# Altium PCB SENSEI_Base-Board_Clean.PcbDoc (part 2 of 7)
Units mm, origin at the board's own origin, x right, y up, seen from the top; angles counter-clockwise.
Board outline 25.2 x 15.15 mm, 8 copper layers (Top Sig/Pwr, GND1, Sig1, GND2, Sig2, Pwr, GND3, Bot Sig/Pwr), stack 1.53 mm thick; 187 components, 192 nets, 951 pads, 1831 vias.
Unrouted connection lines stored in the file: 214.
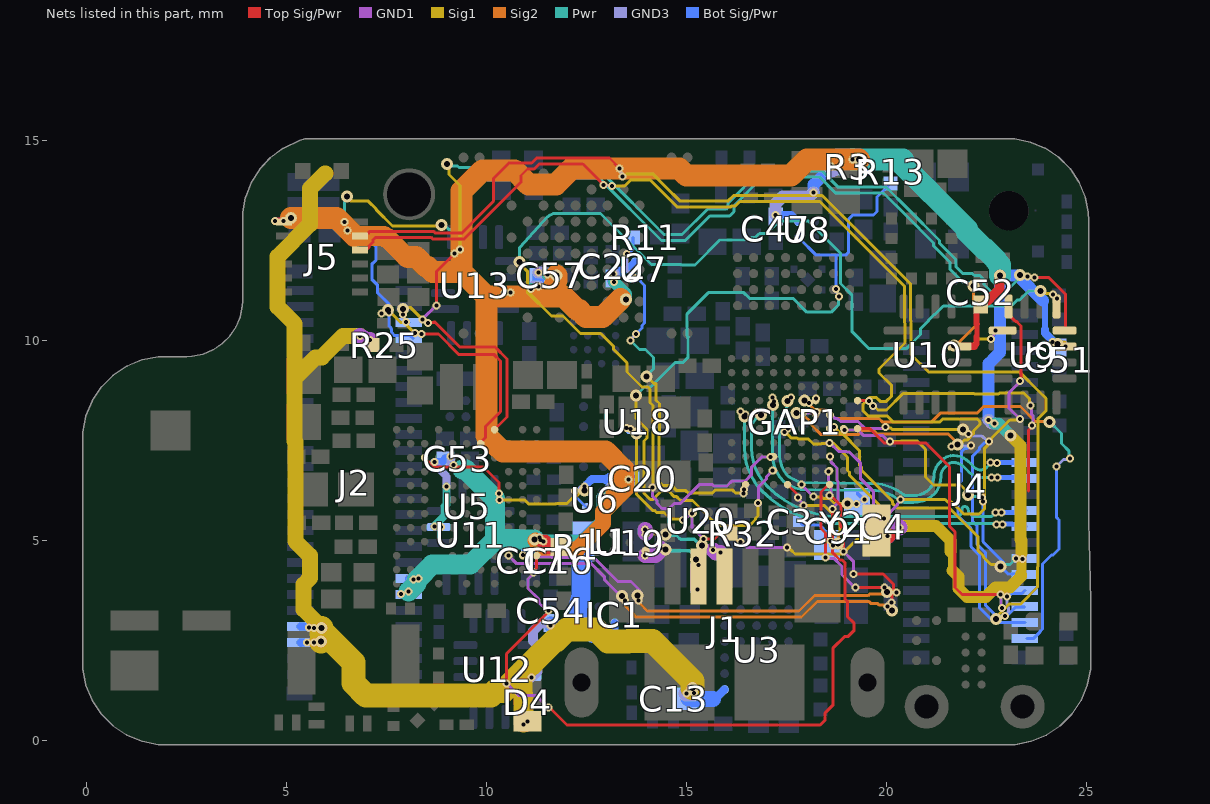
[diagram p8: the nets of this part, all layers, seen from the top]

## Part data
C3 C4: "No Description Available", Capacitance=20pF, Mfr_Name=Kemet, Copyright="Copyright (C) 2022 Ultra Librarian. All rights reserved.", Manufacturer_Part_Number=CBR02C200F5GAC, RefDes=RefDes, Type=DEV
C5 C6 C7 C12 C18 C20 C22 C23 C47 C51 C52 C53 C54 C57 C64 C65 C69 C70 C74 C84 C92 C95 C97: library part CMP-13271-003594-1, "Cap Ceramic 1uF 10V X5R ±10% Pad SMD 0201 +85°C T/R", Capacitance=1uF, Case Code (Imperial)=0201, Case Code (Metric)=0603, Max Operating Temperature=85°C, Min Operating Temperature=-55°C, Tolerance=10%, Voltage Rating=10V, Case/Package=0201, Length=0.024inch, Mount="Surface Mount", Packaging="Cut Tape", Thickness=0.013inch, Width=0.012inch
C8 C10 C13 C14 C24 C49 C55: library part CMP-2000-05437-2, "CAP CER 4.7UF 6.3V X5R 0402", Capacitance=4.7uF, Case/Package=0402, Dielectric=X5R, Dielectric Material=Ceramic, Max Operating Temperature=85°C, Min Operating Temperature=-55°C, Tolerance=10%, Voltage=6.3V, Depth=0.5mm, Height=0.5mm, Lead Free="Lead Free", Length=1mm, Mount="Surface Mount", RoHS Compliant=Yes, Series=C, Termination=SMD/SMT
C9 C11 C19 C21 C25 C26 C27 C28 C29 C30 C31 C33 C34 C35 C36 C37 C38 C39 C48 C50 C56 C58 C60 C61 C73 C75 C76 C77 C78 C79 C80 C81 C82 C85 C86 C88 C89 C90 C94 C96 C98 C99: library part CMP-06035-035508-1, "Chip Multilayer Ceramic Capacitors for General Purpose, 0201, 0.10uF, X7R, 15%, 10%, 16V", Capacitance=0.1uF, Case/Package=0201
C15 C16 C17 C40 C41 C42 C43: library part CMP-13271-000286-1, "Cap Ceramic 22uF 6.3V X5R ±20% SMD 0402 +85°C Paper T/R", Capacitance=22uF, Case Code (Imperial)=0402, Case Code (Metric)=1005, Max Operating Temperature=85°C, Min Operating Temperature=-55°C, Tolerance=20%, Voltage Rating=6.3V, Case/Package=0402, Length=0.039inch, Mount="Surface Mount", Packaging="Tape and Reel", Thickness=0.022inch, Width=0.02inch
C32 C44 C59 C83 C87: library part CMP-13271-000002-1, "CAP CER 10UF 10V X5R 0402", Capacitance=10uF, Manufacturer=Samsung, Temperature="-55°C to +85°C", Temperature Characteristic=X5R, Temperature Coefficient=15%, Temperature Range High=+85°C, Temperature Range Low=-55°C, Tolerance=20%, Voltage Rating=10V, Automotive=No, Category=Cap, ComponentLink2Description=Datasheet, ComponentLink2URL=http://www.samsungsem.com/kr/support/product-search/mlcc/__icsFiles/afieldfile/2019/05/10/19-CL05A106MP5NUNC.pdf, Device Class L1="Passive Components", Device Class L2=Capacitors, Device Class L3="Ceramic Capacitors", Digikey Description="CAP CER 10UF 10V X5R 0402", Height=0.7mm, Ipc Land Pattern Name=CAPC10050X50, Lead Free=Yes, Manufacturer Part Number=CL05A106MP5NUNC, Material=Ceramic, Octopart=https://octopart.com/cl05a106mp5nunc-samsung-22457395, Package=CL05A106MP5NUNC, RoHS=TRUE
C45 C93: library part CMP-06035-014902-1, "Chip Multilayer Ceramic Capacitors for General Purpose, 0402, 2.2uF, X7S, 22%, 10%, 6.3V", Capacitance=2.2uF, Case Code (Imperial)=0402, Case Code (Metric)=1005, Dielectric=X7S, Max Operating Temperature=125°C, Min Operating Temperature=-55°C, Package Quantity=10000, Resistor Type=Ceramic, Tolerance=10%, Voltage Rating=6.3V, Case/Package=0402, Height=0.5mm, Length=0.039inch, Mount="Surface Mount", Packaging="Tape and Reel", Termination=SMD/SMT, Thickness=0.022inch, Voltage Rating (DC)=6.3V, Weight=0.000212oz, Width=0.02inch
C46: library part CMP-06035-035563-1, "Chip Multilayer Ceramic Capacitors for General Purpose, 0201, 3300pF, X7R, 15%, 10%, 25V", Capacitance=3.3nF, Case Code (Imperial)=0201, Case Code (Metric)=0603, Dielectric=X7R, Max Operating Temperature=125°C, Min Operating Temperature=-55°C, Package Quantity=15000, Resistor Type=Ceramic, Tolerance=10%, Voltage Rating=25V, Case/Package=0201, Height=0.3mm, Length=0.024inch, Mount="Surface Mount", Packaging="Tape and Reel", Termination=SMD/SMT, Thickness=0.013inch, Voltage Rating (DC)=25V, Weight=1.2E-05oz, Width=0.012inch
C62 C63: library part CMP-06035-019132-1, "Chip Multilayer Ceramic Capacitors for General Purpose, 0201, 110pF, C0G, 30ppm/°C, 5%, 50V", Capacitance=110pF, Case Code (Imperial)=0201, Case Code (Metric)=0603, Dielectric=C0G, Max Operating Temperature=125°C, Min Operating Temperature=-55°C, Package Quantity=1, Tolerance=5%, Voltage Rating=50V, Case/Package=0201, Height=0.3mm, Length=0.024inch, Mount="Surface Mount", Packaging="Tape and Reel", Termination=SMD/SMT, Thickness=0.013inch, Voltage Rating (DC)=50V, Weight=1.2E-05oz, Width=0.3mm
C66: library part CMP-2010-01694-2, "Chip Multilayer Ceramic Capacitors for General Purpose, 0201, 2200pF, X7R, 15%, 10%, 16V", Capacitance=2.2nF, Case Code (Imperial)=0201, Case Code (Metric)=0603, Dielectric=X7R, Max Operating Temperature=125°C, Min Operating Temperature=-55°C, Package Quantity=1, Tolerance=10%, Voltage=16V, Case/Package=0201, Depth=0.3mm, Height=0.3mm, Lead Free="Lead Free", Length=0.6mm, Material=Ceramic, Mount="Surface Mount", Packaging="Tape and Reel", Radiation Hardening=No, REACH SVHC="No SVHC", Termination=SMD/SMT, Thickness=0.013inch, Voltage Rating=16V, Voltage Rating (DC)=16V, Width=0.012inch
C67: library part CMP-2010-00919-2, "Ceramic Capacitor 0.7pF ±0.1pF 25V C0G 0201 (0603 Metric)", Capacitance=0.7pF, Case Code (Imperial)=0201, Case Code (Metric)=0603, Dielectric=C0G, Max Operating Temperature=125°C, Min Operating Temperature=-55°C, Package Quantity=15000, Voltage Rating=25V, Case/Package=0201, Depth=0.3mm, Height=0.3mm, Lead Free="Lead Free", Length=0.6mm, Mount="Surface Mount", Packaging="Tape and Reel", Radiation Hardening=No, Termination=SMD/SMT, Thickness=0.013inch, Voltage Rating (DC)=25V, Width=0.012inch
C68: library part CMP-06035-035508-1, Case/Package=0201, Capacitance=DNF
C71 C72: library part CMP-2000-05437-2, "CAP CER 4.7UF 6.3V X5R 0402 10%", Capacitance=4.7uF, Case/Package=0402, Dielectric=X5R, Dielectric Material=Ceramic, Max Operating Temperature=85°C, Min Operating Temperature=-55°C, Tolerance=10%, Voltage=6.3V, Depth=0.5mm, Height=0.5mm, Lead Free="Lead Free", Length=1mm, Mount="Surface Mount", RoHS Compliant=Yes, Series=C, Termination=SMD/SMT
C91: library part CMP-06035-033356-1, "Chip Multilayer Ceramic Capacitors for General Purpose, 0805, 100uF, X5R, 15%, 20%, 4V", Capacitance=100uF, Case Code (Imperial)=0805, Case Code (Metric)=2012, Dielectric=X5R, Max Operating Temperature=85°C, Min Operating Temperature=-55°C, Tolerance=20%, Voltage Rating=4V, Case/Package=0805, Length=0.079inch, Mount="Surface Mount", Packaging="Tape and Reel", Thickness=0.057inch, Voltage Rating (DC)=4V, Width=0.049inch
D1: library part D_RGB_LED, "SML-LX0404SIUPGUSB RGB LED", Manufacturer=Lumex, Supplier Part Number 1=696-LX0404SIUPGUSB, Manufacturer Part Number=SML-LX0404SIUPGUSB, Supplier 1=Mouser
D2 D3: "TVS Diode (Bi-directional)", Manufacturer_Name="Texas Instruments", Mouser Part Number=595-TPD1E01B04DPYRQ1, Arrow Part Number=TPD1E01B04DPYRQ1, Arrow Price/Stock=https://www.arrow.com/en/products/tpd1e01b04dpyrq1/texas-instruments?region=nac, Datasheet Link=https://www.ti.com/lit/ds/symlink/tpd1e01b04-q1.pdf?ts=1677834076075&ref_url=https%253A%252F%252Fwww.ti.com%252Fproduct%252FTPD1E01B04-Q1%252Fpart-details%252FTPD1E01B04DPYRQ1, Height=0.45mm, Manufacturer_Part_Number=TPD1E01B04DPYRQ1, Mouser Price/Stock=https://www.mouser.co.uk/ProductDetail/Texas-Instruments/TPD1E01B04DPYRQ1?qs=doiCPypUmgEwTnvBpZhkOw%3D%3D
D4: library part CMP-1055-00233-1, "Schottky Barrier Diode, 2-Pin DSN, Pb-Free, Tape and Reel", Manufacturer="On Semiconductor", ComponentLink1Description="Manufacturer URL", ComponentLink1URL=http://www.onsemi.com/, ComponentLink2Description=Datasheet, ComponentLink2URL=http://www.onsemi.com/pub_link/Collateral/NSR20F30-D.PDF, ComponentLink3Description="Package Specification", ComponentLink3URL=http://www.onsemi.cn/pub_link/Collateral/152AB.PDF, Configuration=Single, DatasheetVersion="Rev. 3", IFSM Max (A)=28, Mounting Technology="Surface Mount", PackageDescription="2-Pin Micro Molded Package, Body 1.6 x 0.8 mm", PackageReference=DSN-2-512AB-01, PackageVersion="Rev. B, 01/2011", Packing="Tape and Reel", PartNumber=NSR20F30NXT5G, RoHS=TRUE
E1: "Integrated Chip Antenna", Manufacturer="Fractus Antennas", Supplier Part Number 1=128-NN03-320, Manufacturer Part Number=NN03-320, Supplier 1=Mouser
E2: library part U.FL-R-SMT-1(01)_GND_pad
IC1: library part MAX38643AENT+, "Integrated Circuit", Manufacturer_Name="Analog Devices", Mouser Part Number=700-MAX38643AENT+, Datasheet Link=https://www.mouser.com/datasheet/2/256/MAX38640A-MAX38643B-1516623.pdf, Height=0.5mm, Manufacturer_Part_Number=MAX38643AENT+, Mouser Price/Stock=https://www.mouser.co.uk/ProductDetail/Maxim-Integrated/MAX38643AENT%2b?qs=PzGy0jfpSMssjCGgbzOt4w%3D%3D
IC2: "Integrated Circuit", Manufacturer_Name="Texas Instruments", Mouser Part Number=595-TS5A3153YZPR, Datasheet Link=http://www.ti.com/lit/gpn/ts5a3153, Height=0.5mm, Manufacturer_Part_Number=TS5A3153YZPR, Mouser Price/Stock=https://www.mouser.co.uk/ProductDetail/Texas-Instruments/TS5A3153YZPR?qs=BBezV1N05%2FtCq%2FSrTOTYog%3D%3D
IC3: "Integrated Circuit", Manufacturer_Name="Texas Instruments", Mouser Part Number=595-TS5A3167YZPR, Arrow Part Number=TS5A3167YZPR, Arrow Price/Stock=https://www.arrow.com/en/products/ts5a3167yzpr/texas-instruments, Datasheet Link=http://www.ti.com/lit/gpn/ts5a3167, Height=0.5mm, Manufacturer_Part_Number=TS5A3167YZPR, Mouser Price/Stock=https://www.mouser.co.uk/ProductDetail/Texas-Instruments/TS5A3167YZPR/?qs=0O%2FZFlpUpJV2gM0iE3NeCQ%3D%3D
J1: "No Description Available", Mfr_Name="Global Connector Technology", Copyright="Copyright (C) 2023 Ultra Librarian. All rights reserved.", Manufacturer_Part_Number=USB3076-30-A, RefDes=RefDes, Type=DEV
J2: library part CONN_50P_M_COMBI_INTERFACE, "50Pin 0.4mm pitch connector footprint that accepts (male) connectors intended for different stacking heights: / Hirose - DF40C-50DP-0.4V(51) for 1.5mm - 3mm stacking height / JAE - WP7B-P050VA1-R8000 - for 0.7mm stacking height"
J4: "CONN PLUG 40POS SMD GOLD", Current Rating=300mA, Max Operating Temperature=85°C, Min Operating Temperature=-35°C, Package Quantity=1, Voltage Rating=30V, Connector Type=Plug, Contact Material=Bronze, Contact Plating=Gold, Gender=Male, Housing Material=Polymer, Lead Free="Lead Free", Mated Stacking Heights=4mm, Mount="Surface Mount", Number of Contacts=40, Number of Positions=40, Number of Rows=2, Orientation=Straight, Packaging="Tape and Reel", Pitch=0.4mm, REACH SVHC="No SVHC", Termination=SMD/SMT
J5: "Connector", Manufacturer_Name=Molex, Mouser Part Number=538-505066-1222, Datasheet Link=https://www.molex.com/pdm_docs/sd/5050661222_sd.pdf, Height=0.63mm, Manufacturer_Part_Number=505066-1222, Mouser Price/Stock=https://www.mouser.co.uk/ProductDetail/Molex/505066-1222?qs=byeeYqUIh0OlQo7UKX%2FsWw%3D%3D
J8: library part DF52-2S-0.8H_21_, "Connector", Manufacturer_Name=Hirose, Mouser Part Number=798-DF52-2S-0.8H21, Datasheet Link=https://datasheet.datasheetarchive.com/originals/distributors/DKDS-30/591726.pdf, Height=1mm, Manufacturer_Part_Number=DF52-2S-0.8H(21), Mouser Price/Stock=https://www.mouser.co.uk/ProductDetail/Hirose-Connector/DF52-2S-0.8H21?qs=%2FKR40Cd6GUpAHUMGMtWbig%3D%3D
L1: library part CMP-06042-016331-1, "FIXED IND 1UH 1.6A 144 MOHM SMD", Case Code (Imperial)=0603, Case Code (Metric)=1608, Current Rating=1.6A, DC Resistance (DCR)=144mR, Inductance=1uH, Max Operating Temperature=85°C, Min Operating Temperature=-40°C, Saturation Current=2A, Test Frequency=1MHz, Tolerance=20%, Case/Package=0603, Core Material=Metal, Mount="Surface Mount", Packaging="Cut Tape", RoHS Compliant=Yes, Shielding=Shielded
L2: library part L_0805_1.5uH_2A, "L 1.5uH 2A 0805", Inductance=1.5uH, Manufacturer=Murata, Manufacturer Part Number=DFE201210S-1R5M=P2, Supplier Part Number 1=81-DFE201210S-1R5MP2, Supplier 1=Mouser
L3 L10: library part CMP-06042-017052-1, "Multilayer type Inductor for Power Lines 10uH ±20% @1MHz, 300mA, Max DCR 1.365Ω, SRF 32MHz", Parameter 1=10uH
L4 L5: library part CMP-06042-003257-1, "Film type RF Inductor 2.2nH ±0.1nH 600mA 0.12Ω 0201 (0603)", Case Code (Imperial)=0201, Case Code (Metric)=0603, Current Rating=600mA, DC Resistance (DCR)=120mR, Inductance=2.2nH, Max Operating Temperature=125°C, Min Operating Temperature=-55°C, Resistor Type="Thin Film", Self Resonant Frequency=9GHz, Test Frequency=500MHz, Case/Package=0201, Core Material=Non-Magnetic, Mount="Surface Mount", Packaging="Tape and Reel", Shielding=Unshielded
L6 L8 L9: library part CMP-06042-008254-1, "Wire Wound RF Inductor 5.6nH ±5% 330mA 0.33Ω 0201 (0603)", Case/Package=Nonstandard, Current Rating=330mA, DC Resistance (DCR)=330mR, Inductance=5.6nH, Max Operating Temperature=125°C, Min Operating Temperature=-55°C, Package Quantity=10000, Resistor Type=Wirewound, Self Resonant Frequency=8.3GHz, Test Frequency=100MHz, Tolerance=5%, Core Material=Non-Magnetic, Height=0.4mm, Height - Seated (Max)=0.018inch, Length=0.021inch, Max DC Current=330mA, Mount="Surface Mount", Packaging="Tape and Reel", Q Factor=47, Shielding=Unshielded, Termination=SMD/SMT, Width=0.016inch
L7: library part CMP-06042-006199-1, "Shielded Wirewound Inductor 4.7uH 20% 1100mA 0.288Ω 0806 (2016)"
MIC1: "No Description Available", Mfr_Name=InvenSense, Copyright="Copyright (C) 2023 Ultra Librarian. All rights reserved.", Manufacturer_Part_Number=MMICT5838-00-012, RefDes=RefDes, Type=DEV
R1 R3 R5 R8 R10: library part CMP-2002-03047-1, Manufacturer="Vishay Dale", Tolerance=1%, Part Number=CRCW04021R00FKEDHP
R4: library part CMP-2004-01604-1, Manufacturer="KOA Speer", Resistance=22k, Part Number=RK73H1HTTC2202F
R6 R7: library part CMP-1010-00642-1, "100K 0.05W 1% 0201 (0603 Metric)  SMD", Case-EIA=0201, Case-Metric=0603, Power="0.05 W", Tolerance="1 %", Technology=SMT
R9 R24 R26 R27 R28 R29 R31: library part CMP-26527-002755-1, "RES 10K OHM 1% 1/20W 0201", Case Code (Imperial)=0201, Case Code (Metric)=0603, Max Operating Temperature=125°C, Max Power Dissipation=50mW, Min Operating Temperature=-55°C, Resistance=10k, Resistor Type="Thick Film", Temperature Coefficient=200ppm/°C, Tolerance=1%, Case/Package=0201, Contact Plating=Tin, Height=0.009inch, Length=0.024inch, Mount="Surface Mount", Number of Terminations=2, Packaging="Tape and Reel", Power Rating=50mW, RoHS Compliant=Yes, Series=RMCF, Width=0.012inch
R11 R12 R13 R17 R32: library part CMP-1010-00146-1, "1M 0.05W 5% 0201 (0603 Metric)  SMD", Case-EIA=0201, Case-Metric=0603, Power="0.05 W", Tolerance="5 %", Technology=SMT
R14 R15: library part CMP-2002-01533-2, "100kΩ ±0.5% 0.0625W 1/16W Chip Resistor 0402 (1005 Metric) Thin Film", Case Code (Imperial)=0402, Case Code (Metric)=1005, Max Operating Temperature=125°C, Max Power Dissipation=63mW, Min Operating Temperature=-55°C, Package Quantity=1, Resistance=100k, Resistance Tolerance=0.5%, Resistor Type="Thin Film", Temperature Coefficient=25ppm/°C, Voltage Rating=25V, Case/Package=0402, Height=0.016inch, Lead Free="Lead Free", Length=0.039inch, Number of Pins=2, Number of Terminations=2, Packaging="Tape and Reel", Power Rating=63mW, REACH SVHC="No SVHC", RoHS Compliant=Yes, Series=RR, Technology="THIN FILM", Termination=SMD/SMT, Tolerance=0.5%, Voltage Rating (DC)=25V, Width=0.02inch, Working Voltage=25V
R16: library part "RES DNM", "Resistor"
R18 R21 R30: library part CMP-26527-001890-1
R19 R20: library part CMP-2004-03369-1, Manufacturer=Panasonic, Resistance=500, Part Number=ERJ-1GNF4990C
R22: library part CMP-1010-00642-1, "100K 0.05W 1% 0201 (0603 Metric)  SMD", Case-EIA=0201, Case-Metric=0603, Power="0.05 W", Resistance=100k, Tolerance="1 %", Technology=SMT
R23: library part CMP-26527-001890-1, "0Ω ±0 0.05W 0201 Thick Film Chip Resistor AEC-Q200 compliant", Case Code (Imperial)=0201, Case Code (Metric)=0603, Max Operating Temperature=125°C, Max Power Dissipation=50mW, Min Operating Temperature=-55°C, Package Quantity=10000, Resistance=0Ohm, Resistor Type="Thick Film", Case/Package=0201, Contact Plating=Tin, Height=0.009inch, Height - Seated (Max)=0.01inch, Lead Free="Lead Free", Length=0.024inch, Mount="Surface Mount", Number of Terminations=2, Packaging="Tape and Reel", Power Rating=50mW, Radiation Hardening=No, RoHS Compliant=Yes, Series=RMCF, Width=0.012inch
R25: library part CMP-1010-00176-1, "2R2 0.05W 1% 0201 (0603 Metric)  SMD", Case-EIA=0201, Case-Metric=0603, Power="0.05 W", Tolerance="1 %", Technology=SMT
R33 R34: library part CMP-26527-007617-1, "RES 0 OHM JUMPER 1/16W 0402", Case Code (Imperial)=0402, Case Code (Metric)=1005, Current Rating=1A, Max Operating Temperature=155°C, Max Power Dissipation=63mW, Min Operating Temperature=-55°C, Resistance=0R, Resistor Type="Thick Film", Working Voltage=50V, Case/Package=0402, Construction=Rectangular, Contact Plating=Tin, Depth=0.5mm, Features="Automotive AEC-Q200", Height=0.016inch, Lead Free="Lead Free", Length=0.039inch, Military Standard=Not, Mount="Surface Mount", Number of Terminations=2, Packaging="Tape and Reel", Power Rating=63mW, Radiation Hardening=No, RoHS Compliant=Yes, Series=RMCF, Technology="THICK FILM", Width=0.02inch
R35 R44 R45 R46 R47 R48: library part CMP-2004-00655-1, Manufacturer="Vishay Dale", Resistance=49.9, Part Number=CRCW020149R9FNED
RT1: "Thermistor", Manufacturer_Name=Panasonic, Mouser Part Number=667-ERT-JZEG103FA, Arrow Part Number=ERT-JZEG103FA, Arrow Price/Stock=https://www.arrow.com/en/products/ert-jzeg103fa/panasonic?region=nac, Datasheet Link=https://industrial.panasonic.com/cdbs/www-data/pdf/AUA0000/AUA0000C8.pdf, Height=0.33mm, Manufacturer_Part_Number=ERT-JZEG103FA, Mouser Price/Stock=https://www.mouser.co.uk/ProductDetail/Panasonic/ERT-JZEG103FA?qs=8rMlxy%252BA7jnazXT5AW8efg%3D%3D
S1: "Switch", Manufacturer_Name=LITTELFUSE, Datasheet Link=https://www.ckswitches.com/media/2866/nanot.pdf, Height=1mm, Manufacturer_Part_Number=NanoT160BP
U1: "Macronix 512 Mbit WLCSP Flash"
U2: "512 Mbit octal SPI PSRAM APmemory", Mfr_Name="AP Memory", Copyright="Copyright (C) 2022 Ultra Librarian. All rights reserved.", Manufacturer_Part_Number=APS512XXN-OB9-WB, RefDes=RefDes, Type=DEV
U3: "Buck-Boost Converter With LDO Regulator 5-OUT 30-Pin WLP T/R", Manufacturer=Maxim, Supplier Part Number 1=700-MAX77654BENV+T, Manufacturer Part Number=MAX77654BENV+T, Supplier 1=Mouser
U4 U6 U7 U8 U18 U20: "Integrated Circuit", Manufacturer_Name="Texas Instruments", Mouser Part Number=595-TPS22916CYFPR, Arrow Part Number=TPS22916CYFPR, Arrow Price/Stock=https://www.arrow.com/en/products/tps22916cyfpr/texas-instruments?region=nac, Datasheet Link=http://www.ti.com/lit/gpn/tps22916, Height=0.5mm, Manufacturer_Part_Number=TPS22916CYFPR, Mouser Price/Stock=https://www.mouser.co.uk/ProductDetail/Texas-Instruments/TPS22916CYFPR?qs=EU6FO9ffTweddKR4NsfVQg%3D%3D
U5: library part nRF5340-CLAA, "Multi-protocol Bluetooth Low Energy, IEEE 802.15.4, ANT and 2.4GHz proprietary system-on-chip", Manufacturer=Nordic, Supplier Part Number 1=949-NRF5340-CLAA-R7, Manufacturer Part Number=NRF5340-CLAA-R7, Supplier 1=Mouser
U9 U10 U11 U12 U13: library part CMP-04892-000017-1, "IC SWITCH", Ambient Temperature Range High=+125°C, Ambient Temperature Range Low=-40°C, Manufacturer="Texas Instruments", Max Junction Temp=+150°C, Max Supply Voltage=5.5V, Min Supply Voltage=1.08V, Nominal Supply Current=0.008uA, On State Resistance=2Ω, Package=RSV0016A, Temperature="-40°C to +125°C", -3Db Bandwith=300MHz, Automotive=No, Category=IC, ComponentLink2Description=Datasheet, ComponentLink2URL=http://www.ti.com/lit/ds/symlink/tmux1111.pdf, Device Class L1="Integrated Circuits (ICs)", Device Class L2="Interface ICs", Device Class L3="Analog Switches", Digikey Description="IC SWITCH", Height=0.55mm, Interface=LVCMOS, Lead Free=Yes, Manufacturer Part Number=TMUX1112RSVR, Mux Demux Ratio=1:1, Number of Circuits=4, Octopart=https://octopart.com/tmux1112rsvr-texas+instruments-99389231, RoHS=TRUE, Standoff Height=0mm, Temperature Range High=+125°C, Temperature Range Low=-40°C, Throw Configuration=SPST
U14: "No Description Available", Mfr_Name=STMicroelectronics, Copyright="Copyright (C) 2023 Ultra Librarian. All rights reserved.", Manufacturer_Part_Number=LIS2DUXS12TR, RefDes=RefDes, Type=DEV
U15: library part IS31FL3194, "LED Driver with Programmable Pattern Sequencing 3-Channel 40mA 8-Pin WCSP T/R", Manufacturer=ISSI, Supplier Part Number 1=2521-IS31FL3194-CLS2-TRCT-ND, Manufacturer Part Number=IS31FL3194-CLS2-TR, Supplier 1=Digi-Key
U17: "QSPI PSRAM in WLCSP package / 144 MHz / 128 Mbit", Mfr_Name="AP Memory", Manufacturer_Part_Number=APS12804O-SQRH-WA
U19: library part PESD1USB30, "ESD Suppressor Diode TVS Uni-Dir 5V 5-Pin WLCSP T/R", Manufacturer="NXP Semiconductors", Supplier Part Number 1=771-PESD1USB30Z, Manufacturer Part Number=PESD1USB30, Supplier 1=Mouser
Y2: "24MHz Â±10ppm Crystal 10pF 150 Ohms 4-SMD, No Lead", Frequency=24MHz, Package="SMD-4 ECS International", Availability=Unavailable, MF="ECS Inc.", MP=ECS-240-10-47Q-CES-TR, Price=None, SnapEDA_Link=https://www.snapeda.com/parts/ECS-240-10-47Q-CES-TR/ECS%20Inc./view-part/4221464/?ref=snap
Y3: library part Y_ECS-320-7-48B-JTM-TR5, "Crystal 32MHz 7pF ±20ppm ±20ppm 4-Pin Ultraminiature CSMD T/R", Manufacturer="ECS International", Supplier Part Number 1=520-ECS320748BJTMTR5, Manufacturer Part Number=ECS-320-7-48B-JTM-TR5, Supplier 1=Mouser
Y4: library part CMP-40224-000031-1, "CRYSTAL 32.7680KHZ 9PF SMD", Case/Package=SMD/SMT, ESR (Equivalent Series Resistance)=90kR, Frequency=32.768kHz, Frequency Tolerance=20ppm, Load Capacitance=9pF, Max Operating Temperature=85°C, Min Operating Temperature=-40°C, Mount="Surface Mount", Packaging="Tape and Reel", RoHS Compliant=Yes

## Free pads (board coordinates)
  round 1.3 hole 1.1: 1(8.064,13.658)

## Via types
v1: diameter 0.2, hole 0.1, Top Sig/Pwr to GND1, 467 vias
v2: diameter 0.2, hole 0.1, GND3 to Bot Sig/Pwr, 431 vias
v3: diameter 0.2, hole 0.1, GND1 to Sig1, 369 vias
v4: diameter 0.3, hole 0.15, Sig1 to Pwr, 279 vias
v5: diameter 0.2, hole 0.1, Pwr to GND3, 270 vias
v6: diameter 0.3, hole 0.15, Top Sig/Pwr to Bot Sig/Pwr, tented both sides, 15 vias

## Nets (pads, with @x,y where several pads share a name; then routed paths per layer and width w, separated by ;. In a path a pad name is that pad's centre, name@x,y a point inside that pad or via, vN(x,y) a via of type N, cw(c..) or ccw(c..) an arc to the next point about the centre after c; other vN are vias at no path point)
1V8: C16.1 C17.1 C20.1 C22.1 C47.1 C51.1 C52.1 C53.1 C54.1 C57.1 C91.1 IC1.B2 J2.6 J2.7 J5.1 L1.2 R1.1 R3.1 U6.A2 U7.A2 U8.A2 U9.11 U10.11 U11.11 U12.11 U13.11 | length 88.7
  Top Sig/Pwr w0.12: 22.25,10.103 22.25,10.113 22.26,10.123 22.26,10.407 22.27,10.416
  Top Sig/Pwr w0.15: 22.211,9.878 22.25,9.917 22.25,10.103 ; 22.243,10.408 22.243,10.601 22.244,10.794 C52.1@22.35,10.9
  Top Sig/Pwr w0.18: v1@4.71,12.986 J5.1@4.818,12.986 ; U10.11@21.825,9.85 21.835,9.86 22.193,9.86 22.211,9.878
  Top Sig/Pwr w0.2: v1(24.25,9.85) U9.11@24.45,9.85
  Top Sig/Pwr w0.25: C52.1@22.35,10.9 22.35,10.946 22.406,11.002 22.535,11.002 22.825,11.293 22.825,11.616 v6(22.835,11.626)
  Top Sig/Pwr w0.4: v1@11.451,4.947 11.54,4.858 11.824,4.858 R1.1@11.849,4.833 ; C91.1@19.75,5.25 19.883,5.117 v1(20.025,5.117)
  GND1 w0.18: v1(4.709,12.986) 4.913,12.986 v3(4.918,12.99)
  GND1 w0.2: v3(11.325,5.075) v1(11.425,4.975) ; v1(24.25,9.85) v3(24.475,9.85)
  GND1 w0.4: v1(20.025,5.117) 20.233,5.325 v3(20.325,5.325)
  Sig2 w0.4: v4@11.219,5 11.439,4.78 12.266,4.78 12.916,5.43 12.916,5.722 13.253,6.059 13.253,6.165
  Sig2 w0.5: 6.701,12.615 7.43,12.615 7.483,12.562 7.518,12.562 7.986,12.095 8.029,12.095
  Sig2 w0.55: v4@5.114,13.066 6.25,13.066 6.701,12.615 ; 8.029,12.095 8.233,12.095 8.493,11.835 8.538,11.835 8.653,11.719 9.378,11.719 ; v4(11.753,11.632) 11.752,11.591 cw(c11.202,11.607) 11.592,11.219 11.471,11.098 ; 13.253,6.165 13.416,6.329 13.416,6.785 12.976,7.225 10.407,7.225 10.316,7.316 10.307,7.316 10,7.623 10,11.098 ; v4@13.346,11.034 12.901,10.59 12.487,10.59 12.318,10.759 12.273,10.759 11.933,11.098 11.592,11.098 11.471,11.098 ; v4(19.313,14.525) 18.011,14.525 17.611,14.125 14.993,14.125 14.822,14.296 12.124,14.296 11.732,13.904 11.048,13.904 10.696,14.256 9.896,14.256 9.378,13.739 9.378,11.719 ; 9.378,11.719 10,11.098 ; 10,11.098 11.471,11.098
  GND3 w0.18: v2(10.445,11.2) 10.446,11.198 10.6,11.198 v5(10.601,11.197)
  GND3 w0.2: v2(7.861,3.669) 7.994,3.669 v5(8.05,3.725) ; v2(8.175,4.025) 8.2,4.05 v5(8.3,4.05) ; v5(8.692,5.349) 8.852,5.349 v2(8.856,5.345) ; v2(8.7,6.963) 8.7,6.907 9.001,6.606 v5(9.001,6.353) ; v2@9.097,7.027 9.097,6.959 v5(9.171,6.885) ; v2(11.175,5.025) 11.18,5.02 v5(11.353,5.02) ; v5(24.15,9.969) 24.269,9.85 24.275,9.85 v2(24.3,9.825)
  GND3 w0.25: v2(11.126,1.581) 11.266,1.722 11.266,2.378 11.157,2.487 11.157,2.621 11.158,2.736 11.352,2.93 11.544,2.93 v2(11.597,2.877)
  GND3 w0.3: v5(11.112,11.284) 11.179,11.35 v2(11.3,11.35) ; v2(11.3,11.7) 11.478,11.7 v5(11.524,11.654) ; v5(12.902,6.101) 13.33,6.529 v2(13.548,6.529) ; v2(13.17,11.668) 13.17,11.48 v5(13.183,11.467) ; v2(17.222,13.136) 17.222,13.42 17.402,13.599 18.068,13.599 v2(18.175,13.707) ; v2(22.55,8.013) 22.636,7.926 v5(22.696,7.926)
  GND3 w0.55: v2(18.611,14.356) 18.778,14.523 v5(19.148,14.523)
  Sig1 w0.15: 21.599,4.732 21.599,4.625 21.612,4.612 21.612,4.288 21.642,4.258
  Sig1 w0.18: v3(4.918,12.99) 4.921,12.994 5.011,12.994 5.082,13.065 v4(5.114,13.065)
  Sig1 w0.2: v4(11.2,5.025) 11.219,5.044 11.294,5.044 v3(11.325,5.075) ; v4(24.267,9.915) 24.286,9.896 24.429,9.896 v3(24.475,9.85)
  Sig1 w0.25: 23.362,4.15 23.375,4.163 23.375,4.675
  Sig1 w0.3: v3(20.325,5.325) 20.369,5.369 21.231,5.369 21.6,5 21.6,4.733 21.599,4.732 ; 21.642,4.258 21.795,4.105 21.795,3.807 22.007,3.594 22.486,3.594 22.717,3.826 23.083,3.826 23.362,4.105 23.362,4.15 ; v4@23.1,7.625 v4(23.103,7.623) 23.35,7.375 23.35,5.024 23.374,5 23.374,4.676 23.375,4.675
  Pwr w0.2: v5(8.692,5.349) 8.692,5.366 8.953,5.628 8.953,5.848 9.001,5.896 v5(9.001,6.353) ; v5(9.171,6.885) 9.284,6.772 9.396,6.772 ; v4(11.2,5.025) 11.205,5.02 v5(11.353,5.02) ; v5(24.15,9.969) 24.185,9.969 24.239,9.915 v4(24.267,9.915)
  Pwr w0.3: v5(10.601,11.197) 10.973,11.197 11.06,11.284 v5(11.112,11.284) ; v5(11.353,5.02) 11.374,4.999 12.384,4.999 12.902,5.517 v5(12.902,6.101) ; v5(11.524,11.654) v4(11.753,11.632) ; v5(13.183,11.467) 13.485,11.166 v4(13.485,11.028) ; v5(22.696,7.926) 22.802,7.926 23.103,7.625 v4(23.103,7.623)
  Pwr w0.5: v5(8.05,3.725) 8.253,3.928 v5@8.253,4.014 ; v5(8.3,4.05) 8.3,4.061 8.639,4.4 9.596,4.4 10.205,5.009 ; 9.396,6.772 9.481,6.772 10.205,6.048 10.205,5.009 ; v4(11.2,5.025) 10.81,5.025 10.79,5.045 10.241,5.045 10.205,5.009
  Pwr w0.55: v5(19.148,14.523) 19.311,14.523 v4(19.313,14.525) 19.803,14.525 20.404,14.525 ; 20.273,14.525 22.013,12.786 22.013,12.715 22.439,12.288 22.466,12.288 22.73,12.025 22.73,11.997 22.835,11.893 v6(22.835,11.626)
  Bot Sig/Pwr w0.15: 23.955,10.986 23.96,10.981 23.96,10.273
  Bot Sig/Pwr w0.18: v2(10.445,11.2) 10.495,11.2 U13.11@10.51,11.184 ; IC1.B2@13.198,2.945 13.207,2.936 13.207,2.758 13.213,2.752 13.213,2.61 ; C22.1@13.289,11.707 13.349,11.767 13.4,11.767 13.402,11.769 13.501,11.762 13.707,11.968 U7.A2@13.719,11.968 ; C47.1@17.193,13.189 17.238,13.145 17.617,13.145 17.788,12.975 U8.A2@17.8,12.975
  Bot Sig/Pwr w0.2: v2(7.861,3.669) 7.861,3.66 7.871,3.65 J2.6@8.055,3.65 ; J2.7@8.055,4.05 8.15,4.05 v2(8.175,4.025) ; v2(8.7,6.963) 8.702,6.965 8.891,6.965 C53.1@8.972,7.046 C53.1@8.966,7.053 ; C17.1@11.1,4.875 11.1,4.95 v2(11.175,5.025) ; U6.A2@12.5,6.225 12.501,6.226 12.501,6.408 12.631,6.538 12.987,6.538 13,6.525 ; 23.912,11.035 23.955,10.991 23.955,10.986 ; 23.96,10.273 23.96,10.192 C51.1@24.275,9.877 ; C51.1@24.275,9.891 C51.1@24.275,9.877 ; C51.1@24.291,9.861 C51.1@24.275,9.877
  Bot Sig/Pwr w0.25: 13,6.525 13.075,6.525 13.1,6.55
  Bot Sig/Pwr w0.3: v2(11.3,11.35) C57.1@11.3,11.635 ; C57.1@11.3,11.635 v2(11.3,11.7) ; 13.1,6.55 C20.1@13.568,6.55 ; C22.1@13.119,11.59 C22.1@13.15,11.621 ; C22.1@13.15,11.55 C22.1@13.15,11.621 ; v2(13.17,11.668) 13.15,11.647 C22.1@13.15,11.621 ; C22.1@13.289,11.707 13.261,11.707 13.181,11.627 13.156,11.627 C22.1@13.15,11.621 ; v2(13.548,6.529) C20.1@13.568,6.55 ; C20.1@13.596,6.55 C20.1@13.568,6.55 ; v2(18.175,13.707) 18.175,13.9 18.611,14.336 v2(18.611,14.356) ; v2(22.55,8.013) 22.55,9.421 22.735,9.606 22.835,9.706 v6(22.835,11.626) 23.277,11.626 23.905,10.998
  Bot Sig/Pwr w0.33: v2(11.597,2.877) 11.604,2.884 C54.1@11.604,2.938 ; C54.1@11.615,2.881 11.62,2.876 11.92,2.847 12.014,2.838 12.287,2.838 12.309,2.816 12.404,2.816 12.442,2.816 12.656,2.602 13.205,2.602 13.213,2.61
  Bot Sig/Pwr w0.4: C17.1@11.061,4.849 C17.1@11.219,4.849 ; C17.1@11.219,5 C17.1@11.219,4.849 ; L1.2@12.425,4.975 12.425,4.924 12.39,4.889 12.35,4.849 C17.1@11.219,4.849
  Bot Sig/Pwr w0.48: 12.287,2.838 12.287,3.368 12.357,3.585 12.357,4.422 12.39,4.455 L1.2@12.39,4.889
  other v2: 9.094,7.098
ADS_A_DR: J2.22 U5.G11 U9.1 | length 33.7
  Top Sig/Pwr w0.075: v1(8.378,10.162) 8.795,10.162 9.31,9.646 10.192,9.646 10.346,9.492 10.346,8.223 9.978,7.855 9.978,7.582 9.85,7.454 U5.G11@9.85,7.425
  GND1 w0.075: v3(8.203,10.184) 8.215,10.173 8.367,10.173 v1(8.378,10.162) ; v3(22.614,10.042) 22.614,10.075 22.699,10.16 22.699,10.226 v1(22.723,10.25)
  Sig2 w0.075: v4(21.679,9.876) 21.679,9.879 21.73,9.879 22.278,10.428 22.278,10.837 22.172,10.943 22.172,11.365 v4(22.168,11.365)
  GND3 w0.075: v5(6.442,12.962) 6.466,12.938 6.466,12.849 6.525,12.79 v2(6.525,12.756) ; v5(7.375,10.674) 7.389,10.688 7.54,10.688 v2(7.554,10.702)
  Sig1 w0.075: v4(6.51,13.602) 6.51,13.591 6.614,13.486 7.042,13.486 7.239,13.289 7.239,13.272 7.649,12.862 8.85,12.862 v4(8.878,12.891) ; v4(7.538,10.766) 7.846,10.458 7.929,10.458 v3(8.203,10.184) ; v4(21.679,9.876) 21.679,9.879 22.135,9.879 22.297,10.042 v3(22.614,10.042)
  Pwr w0.075: v5(6.442,12.962) 6.442,13.474 6.51,13.542 v4(6.51,13.602) ; v5(7.375,10.674) 7.409,10.674 7.501,10.766 v4(7.538,10.766) ; v4(8.878,12.891) 8.939,12.891 9.052,12.778 9.122,12.778 9.275,12.931 9.275,13.375 9.919,14.019 10.631,14.019 10.978,13.672 11.77,13.672 12.156,14.059 12.815,14.059 14.373,12.501 14.968,12.501 15.58,13.113 16.077,13.113 16.185,13.221 16.185,13.373 16.9,14.088 17.196,14.088 17.662,14.087 18.326,14.088 18.728,13.686 19.901,13.686 19.91,13.677 19.937,13.677 20.47,13.144 21.175,12.439 21.175,12.368 21.589,11.954 21.589,11.778 21.911,11.456 22.129,11.456 22.172,11.413 22.172,11.369 v4(22.168,11.365)
  Bot Sig/Pwr w0.075: v2(6.525,12.756) 6.53,12.756 6.765,12.521 7.059,12.521 7.232,12.347 7.232,12.01 7.132,11.909 7.132,11.534 7.268,11.398 7.268,11.205 7.554,10.919 v2(7.554,10.702) 7.554,10.378 7.612,10.32 7.612,10.293 7.626,10.279 7.626,10.194 7.697,10.122 8.094,10.122 J2.22@8.166,10.051
ADS_A_DR_GAP: GAP1.E5 U9.16 | length 12.8
  Top Sig/Pwr w0.075: U9.16@23.039,10.898 23.039,10.661 23.219,10.481 23.249,10.481 23.363,10.367 23.363,9.055 23.33,9.023 v1(23.33,8.989)
  GND1 w0.075: v3(17.451,7.718) v1(17.534,7.799) ; v3(19.935,5.557) 19.938,5.557 20.274,5.893 20.274,5.921 20.351,5.998 v3(20.351,6.027) ; v1(23.33,8.989) 23.33,8.962 23.062,8.694 23.062,8.307 v3(23.332,8.037)
  Sig1 w0.075: v3(17.451,7.718) 17.594,7.58 ccw(c17.646,7.634) 17.646,7.559 17.765,7.559 17.784,7.541 18.043,7.541 18.171,7.412 18.363,7.412 18.376,7.425 18.68,7.425 19.023,7.082 19.023,6.754 19.076,6.702 19.076,6.629 19.842,5.862 19.842,5.684 19.935,5.591 v3(19.935,5.557) ; v3(20.351,6.027) 21.464,6.027 21.527,5.965 21.627,5.965 21.929,5.662 22.315,5.662 22.453,5.8 22.453,7.309 22.622,7.478 22.622,7.558 23.08,8.016 23.311,8.016 v3(23.332,8.037)
ADS_B_DR: J2.23 U5.H12 U9.12 | length 30
  Top Sig/Pwr w0.075: v1(8.538,10.434) 8.562,10.458 8.687,10.458 8.699,10.47 9.333,9.836 10.214,9.836 10.512,9.538 10.512,8.087 U5.H12@10.2,7.775 ; v1(8.741,10.877) 8.741,11.712 v1(9.203,12.174) ; v1(23.691,11.572) 24.057,11.572 24.466,11.163 U9.12@24.466,10.238
  GND1 w0.075: v1(8.538,10.434) 8.536,10.434 8.462,10.508 8.415,10.508 v3(8.391,10.532) 8.394,10.532 8.739,10.877 v1(8.741,10.877) ; v1(9.203,12.174) 9.303,12.274 v3(9.335,12.274) ; v3(23.519,11.597) 23.531,11.585 23.679,11.585 v1(23.691,11.572)
  GND3 w0.075: v5(7.908,10.647) 7.931,10.623 7.931,10.562 7.99,10.504 v2(7.99,10.47)
  Sig1 w0.075: v4(7.912,10.795) 7.949,10.832 8.092,10.832 v3(8.391,10.532) ; v4(9.015,14.41) 9.058,14.367 9.058,14.151 9.335,13.875 v3(9.335,12.274) ; v4(23.335,11.645) 23.359,11.621 23.495,11.621 v3(23.519,11.597)
  Pwr w0.075: v5(7.908,10.647) 7.908,10.791 v4(7.912,10.795) ; v4(9.015,14.41) 9.058,14.367 9.274,14.367 9.315,14.325 10.537,14.325 11.04,13.822 11.707,13.822 12.094,14.209 12.877,14.209 14.435,12.651 14.885,12.651 15.519,13.285 15.988,13.285 16.035,13.331 16.035,13.435 16.838,14.238 17.258,14.238 17.6,14.237 18.388,14.238 18.79,13.836 19.963,13.836 19.972,13.827 19.999,13.827 20.532,13.294 21.325,12.501 21.325,12.43 21.739,12.017 21.739,11.84 21.898,11.681 22.137,11.681 22.192,11.626 22.33,11.626 22.435,11.521 22.435,11.404 22.673,11.166 22.923,11.166 23.258,11.501 23.258,11.506 23.335,11.584 v4(23.335,11.645)
  Bot Sig/Pwr w0.075: v2(7.99,10.47) 8.009,10.45 J2.23@8.055,10.45
ADS_B_DR_GAP: GAP1.D3 U9.13 | length 29.8
  GND1 w0.075: v3(14.151,6.322) 14.151,6.099 14.263,5.987 14.263,5.924 14.362,5.826 ccw(c14.415,5.879) 14.409,5.804 14.461,5.801 ccw(c14.476,6.012) 14.626,5.862 14.666,5.902 cw(c14.719,5.849) 14.719,5.924 14.841,5.924 15.313,6.397 15.647,6.397 15.681,6.363 16.01,6.363 16.142,6.494 16.47,6.494 16.619,6.643 16.619,6.829 16.883,7.093 v1(17.096,7.093) ; v3(24.159,11.15) v1(24.254,11.057)
  Sig1 w0.075: v4(10.82,11.964) 10.82,11.932 11.016,11.736 11.016,11.22 11.621,10.616 11.907,10.616 12.347,10.175 12.853,10.175 13.175,9.853 13.175,9.779 13.51,9.444 13.51,9.212 13.883,8.839 14.038,8.839 14.082,8.795 14.082,8.455 14.159,8.377 14.159,6.33 v3(14.151,6.322) ; v4(23.852,11.24) 23.913,11.24 23.979,11.174 24.135,11.174 v3(24.159,11.15)
  Pwr w0.075: v4(10.82,11.964) 10.82,12.288 10.82,12.317 10.84,12.339 11.505,13.076 cw(c11.7,12.9) 11.59,13.138 11.664,13.173 cw(c11.695,13.104) 11.695,13.179 12.846,13.179 14.124,11.901 14.857,11.901 14.866,11.892 15.207,11.892 15.829,12.513 16.448,12.513 16.483,12.549 16.581,12.549 16.605,12.573 16.711,12.573 16.817,12.679 17.005,12.679 17.316,12.991 18.044,12.991 18.848,12.186 18.848,11.428 19.129,11.148 19.129,10.23 19.56,9.799 20.312,9.799 20.315,9.797 20.491,9.797 20.848,10.154 20.848,10.296 21.042,10.49 21.042,10.504 21.195,10.657 21.208,10.657 21.417,10.866 23.1,10.866 23.141,10.907 23.161,10.907 23.266,11.012 23.327,11.012 23.555,11.24 v4(23.852,11.24)
CS_nRF_GAP: GAP1.H1 U5.K3 | length 14.8
  Top Sig/Pwr w0.075: U5.K3@10.9,4.625 v1(10.912,4.635) v1(10.912,4.635) ; v1@18.464,4.586 18.474,4.595 18.474,5.188 18.362,5.299 18.362,6.216 18.546,6.4 GAP1.H1@18.575,6.4 ; v1(19.225,3.825) 19.228,3.828 19.945,3.828 v1(19.948,3.83)
  GND1 w0.075: v1(10.912,4.635) 10.936,4.612 11.025,4.612 11.048,4.588 11.619,4.588 11.625,4.582 12.672,4.582 13.277,3.977 13.609,3.977 13.808,3.778 13.808,3.508 v3(13.8,3.5) ; v1(18.474,4.579) 18.497,4.555 18.682,4.555 18.884,4.353 18.884,4.148 19.206,3.825 v1(19.225,3.825) ; v1(19.948,3.83) 19.982,3.83 20.088,3.724 20.226,3.724 v3(20.25,3.7)
  Sig2 w0.075: v4(13.778,3.63) 13.821,3.587 13.821,3.438 14.022,3.236 15.233,3.236 15.239,3.242 17.266,3.242 17.271,3.237 17.812,3.237 18.198,3.623 19.538,3.623 19.583,3.668 19.962,3.668 v4(20.005,3.711)
  Sig1 w0.075: v4(13.778,3.63) 13.778,3.522 v3(13.8,3.5) ; v4(20.005,3.711) 20.01,3.705 20.245,3.705 v3(20.25,3.7)
CSI_CLK_N: GAP1.E7 J4.17 | length 9.1
  Top Sig/Pwr w0.125: GAP1.E7@17.525,8.5 17.531,8.494 v1(17.531,8.48)
  GND1 w0.125: v1(17.531,8.48) 17.531,8.489 17.611,8.57 v3(17.611,8.579)
  GND3 w0.125: v5(22.6,6.95) 22.762,6.95 v2(22.762,6.941)
  Sig1 w0.075: v4(17.525,8.488) 17.525,8.493 v3(17.611,8.579)
  Pwr w0.075: v4(17.525,8.488) cw(c16.95,8.488) 17.357,8.082 17.332,8.057 ccw(c17.386,8.005) 17.326,8.05 17.326,7.137 ccw(c18.087,7.137) 17.491,6.664 ccw(c18.087,7.137) 17.507,6.645 17.547,6.604 17.688,6.524 ccw(c17.992,7.06) 17.889,6.453 19.502,6.427 19.513,6.426 19.516,6.426 ; 19.516,6.426 cw(c19.609,5.098) 20.409,6.163 ; 20.425,6.15 ccw(c20.485,6.21) 20.485,6.125 20.67,6.125 ; 20.67,6.125 ccw(c20.672,6.687) 20.939,6.192 ccw(c20.672,6.687) 21.067,6.288 ccw(c21.014,6.341) 21.069,6.289 ccw(c20.797,6.545) 21.143,6.405 ccw(c20.661,6.599) 21.148,6.419 cw(c21.46,6.419) 21.174,6.542 ccw(c21.105,6.572) 21.18,6.567 ccw(c20.661,6.599) 21.181,6.6 cw(c21.673,6.599) 21.24,6.835 cw(c21.673,6.599) 21.325,6.948 21.397,7.02 cw(c21.65,6.769) 21.65,7.125 21.684,7.125 cw(c21.684,6.609) 21.926,7.065 cw(c21.684,6.609) 22.049,6.974 ; 22.05,6.975 ccw(c22.113,7.016) 22.059,6.964 22.173,6.85 ccw(c22.412,7.087) 22.228,6.805 ccw(c22.412,7.087) 22.328,6.761 ccw(c22.328,7.022) 22.512,6.837 v5@22.625,6.95
  Bot Sig/Pwr w0.125: v2@22.771,6.95 J4.17@23.455,6.95
CSI_CLK_P: GAP1.D7 J4.19 | length 9
  Top Sig/Pwr w0.125: GAP1.D7@17.175,8.5 17.181,8.494 v1(17.181,8.48)
  GND1 w0.125: v3(17.145,8.575) 17.145,8.555 17.166,8.533 17.166,8.494 v1(17.181,8.48)
  GND3 w0.075: v5(22.625,6.575) v2(22.775,6.575)
  Sig1 w0.075: v3(17.145,8.575) v4(17.161,8.395)
  Pwr w0.075: v4(17.161,8.395) 17.151,8.242 17.151,7.137 ccw(c18.087,7.137) 17.424,6.476 ccw(c17.478,6.529) 17.44,6.464 17.602,6.371 ccw(c17.992,7.06) 17.841,6.283 ccw(c17.992,7.06) 17.874,6.278 cw(c17.873,6.203) 17.875,6.278 19.719,6.248 19.732,6.248 ; 19.733,6.248 19.736,6.248 cw(c19.609,5.098) 20.294,6.03 ; 20.3,6.025 ccw(c20.481,6.206) 20.481,5.95 20.67,5.95 20.672,5.95 ccw(c20.672,6.687) 21.194,6.166 21.195,6.168 ccw(c20.797,6.545) 21.306,6.341 ccw(c20.661,6.599) 21.356,6.599 cw(c21.673,6.599) 21.449,6.824 21.522,6.897 cw(c21.65,6.769) 21.65,6.95 21.684,6.95 cw(c21.684,6.609) 21.925,6.85 22.05,6.725 ccw(c22.412,7.087) 22.412,6.575 v5(22.625,6.575)
  Bot Sig/Pwr w0.125: v2(22.775,6.575) 23.265,6.575 cw(c23.265,6.49) J4.19@23.325,6.55 ; J4.19@23.454,6.549 J4.19@23.455,6.55
CSI_D0_N: GAP1.C6 J4.23 | length 9.1
  GND3 w0.1: v5(22.725,5.7) v2(22.875,5.7)
  Sig1 w0.075: v3(16.751,8.213) 16.751,8.179 16.764,8.165 v4(16.857,8.14)
  Pwr w0.075: v4(16.857,8.14) 16.767,8.087 16.747,8.07 16.679,7.972 16.621,7.886 16.621,7.317 16.621,7.316 ccw(c17.989,7.319) 17.016,6.357 ; 17.017,6.356 ccw(c18.844,8.176) 18.956,5.6 21.753,5.6 ccw(c21.748,5.73) 21.878,5.73 21.878,5.778 cw(c21.951,5.778) 21.891,5.819 21.9,5.828 21.91,5.838 cw(c21.951,5.778) 21.946,5.851 21.957,5.851 cw(c21.951,5.75) 21.997,5.839 cw(c21.962,5.773) 22.037,5.777 ccw(c22.225,5.788) 22.225,5.6 22.341,5.6 22.594,5.6 ccw(c22.594,5.675) 22.647,5.622 v5(22.725,5.7)
  Bot Sig/Pwr w0.125: v2(22.875,5.7) 23.405,5.7 J4.23@23.455,5.75
  other v1: 16.88,8.15
CSI_D0_P: GAP1.B6 J4.25 | length 9.1
  GND1 w0.125: v3(16.35,8.225) 16.39,8.185 ccw(c16.475,8.271) v1(16.475,8.15)
  GND3 w0.075: v5@22.75,5.425 v2@22.9,5.425
  Sig1 w0.075: v3(16.35,8.225) ccw(c16.418,8.225) 16.37,8.177 v4(16.446,8.101)
  Pwr w0.075: v4(16.446,8.101) 16.446,7.323 16.446,7.321 ccw(c17.986,7.318) 16.709,6.458 ccw(c17.989,7.319) 16.89,6.235 ccw(c18.844,8.176) 18.96,5.425 22.69,5.425 cw(c22.69,5.34) v5(22.75,5.4)
  Bot Sig/Pwr w0.125: v2@22.9,5.425 22.914,5.411 23.139,5.411 23.15,5.4 23.405,5.4 J4.25@23.455,5.35
  other v2: 22.9,5.4
EXT_CHG/VUSB: C13.1 D4.1 J2.47 J2.48 R25.2 U3.E1 | length 30.9
  Top Sig/Pwr w0.5: v1(11.025,0.475) D4.1@11.025,0.485
  GND1 w0.2: v3(10.925,0.4) 11,0.475 v1(11.025,0.475)
  GND1 w0.4: v3(6.834,10.111) 6.863,10.082 6.897,10.082 6.962,10.018 v1(7.082,10.018)
  GND3 w0.2: v2(5.507,2.448) 5.645,2.448 5.646,2.447 v5(5.691,2.447) ; v2(5.553,2.824) 5.561,2.817 v5(5.691,2.817)
  GND3 w0.4: v5(15.002,1.18) 15.178,1.18 v2(15.187,1.188)
  Sig1 w0.4: v4(5.875,2.814) 5.89,2.814 5.422,3.282 5.422,3.901 5.58,4.059 5.58,4.622 5.218,4.984 5.218,7.468 5.2,7.486 5.2,9.055 ; 5.974,14.18 5.962,14.18 5.583,13.801 5.583,12.907 4.776,12.101 4.776,10.841 5.2,10.417 5.2,9.055 ; v3(6.834,10.111) 6.407,10.111 5.879,9.583 5.728,9.583 5.2,9.055
  Sig1 w0.5: 10.9,1.712 10.9,1.149 10.926,1.124 v3@10.926,0.45
  Sig1 w0.6: v4(5.854,2.475) 5.925,2.546 5.925,2.625 ; v4(5.875,2.814) 5.875,2.675 5.925,2.625 ; v4(15.149,1.316) 15.149,1.489 14.149,2.489 13.551,2.489 13.536,2.474 13.039,2.474 12.737,2.775 12.013,2.775 11.739,2.502 11.697,2.502 11.227,2.032 11.22,2.032 10.9,1.712 10.425,1.237 10.219,1.237 10.111,1.129 6.98,1.129 6.669,1.44 6.669,1.95 5.994,2.625 5.925,2.625
  Pwr w0.2: v5(5.691,2.447) 5.799,2.447 5.827,2.475 v4(5.854,2.475) ; v5(5.691,2.817) 5.873,2.817 v4(5.875,2.814) ; v5(15.002,1.18) 15.139,1.316 v4(15.149,1.316)
  Bot Sig/Pwr w0.2: J2.47@5.345,2.85 5.527,2.85 v2(5.553,2.824) ; J2.48@5.355,2.44 J2.48@5.345,2.45 5.505,2.45 v2(5.507,2.448) ; 15.655,1.037 15.707,1.037 15.945,1.275 U3.E1@15.95,1.275
  Bot Sig/Pwr w0.4: C13.1@15.052,1.05 15.056,1.054 C13.1@15.155,1.054 ; C13.1@15.155,1.13 C13.1@15.155,1.054 ; v2(15.187,1.188) 15.187,1.054 C13.1@15.155,1.054 ; 15.655,1.037 15.155,1.037 C13.1@15.155,1.054
EXT_RX_SPI: GAP1.H2 U5.J3 | length 15.6
  Top Sig/Pwr w0.075: v1(10.549,4.629) 10.55,4.628 U5.J3@10.55,4.625 ; v1(18.575,6.128) 18.603,6.128 18.862,5.868 18.862,5.345 18.925,5.283 v1(18.925,4.726) ; v1@19.172,4.153 19.185,4.165 19.914,4.165 20.17,3.909 20.17,3.707 20.133,3.67 20.133,3.47 v1(20.121,3.457)
  GND1 w0.075: v1(10.549,4.629) 10.755,4.423 11.521,4.423 11.53,4.432 12.61,4.432 12.944,4.098 12.944,4.025 13.456,3.513 v3(13.456,3.498) ; v1(18.549,6.724) 18.549,6.501 18.613,6.438 18.613,6.2 18.575,6.162 v1(18.575,6.128) ; v1(18.925,4.726) 19.167,4.484 v1(19.167,4.165) ; v3(20.026,3.355) 20.026,3.359 20.121,3.453 v1(20.121,3.457)
  Sig2 w0.075: v4(13.381,3.618) 13.381,3.557 13.47,3.468 13.47,3.356 13.74,3.086 15.296,3.086 15.301,3.092 17.204,3.092 17.209,3.087 17.874,3.087 18.26,3.473 19.563,3.473 19.613,3.423 19.781,3.423 19.819,3.386 19.939,3.386 20.07,3.255 v4(20.13,3.255)
  Sig1 w0.075: v4(13.381,3.618) 13.381,3.573 v3(13.456,3.498) ; v3(20.026,3.355) 20.126,3.255 v4(20.13,3.255)
EXTUSB_N: J1.2 U19.A2 | length 2.8
  Top Sig/Pwr w0.156: v1(13.957,4.63) 13.965,4.638 13.965,4.651 13.967,4.652 13.967,4.742 U19.A2@13.975,4.75 ; v1(15.276,3.772) 15.276,4.076 J1.2@15.3,4.1
  GND1 w0.381: v1(13.957,4.63) 14.22,4.63 14.343,4.753 v3(14.343,4.814) ; v1(15.276,3.772) 15.276,4.378 v3(15.291,4.394)
  Sig1 w0.079: v3(14.343,4.814) 14.343,4.807 14.375,4.775 v4(14.468,4.775) ; v4(15.235,4.53) 15.235,4.45 v3(15.291,4.394)
  Pwr w0.079: v4(14.468,4.775) 14.496,4.747 15.072,4.747 15.235,4.584 v4(15.235,4.53)
EXTUSB_P: J1.3 U19.A1 | length 2.9
  Top Sig/Pwr w0.156: v1(13.964,5.271) 13.969,5.266 13.969,5.156 U19.A1@13.975,5.15 ; v1(15.845,4.696) 15.95,4.591 J1.3@15.95,4.1
  GND1 w0.381: v1(13.964,5.271) 13.964,5.199 v3(13.987,5.176) ; v3(15.665,4.761) 15.729,4.696 v1(15.845,4.696)
  Sig1 w0.079: v3(13.987,5.176) 14,5.163 14.464,5.163 v4(14.477,5.15) ; v4(15.385,4.875) 15.444,4.875 15.535,4.784 15.642,4.784 v3(15.665,4.761)
  Pwr w0.079: v4(14.477,5.15) 14.5,5.127 14.748,5.127 14.844,5.032 15.19,5.032 15.347,4.875 v4(15.385,4.875)
FAST_XTAL_A: C3.1 GAP1.E1 Y2.1 | length 3.5
  Top Sig/Pwr w0.075: GAP1.E1@17.525,6.4 17.761,6.164 17.761,6.099 v1(17.785,6.075)
  GND1 w0.075: v1(17.785,6.075) 17.785,6.045 17.925,5.905 v3(17.925,5.875)
  GND3 w0.075: v2(18.591,4.993) 18.591,4.969 18.664,4.896 v5(18.664,4.873)
  Sig1 w0.075: v3(17.925,5.875) 17.928,5.872 18.445,5.872 18.829,5.488 18.829,5.227 18.792,5.19 18.792,4.934 v4(18.785,4.927)
  Pwr w0.075: v5(18.664,4.873) 18.718,4.927 v4(18.785,4.927)
  Bot Sig/Pwr w0.075: C3.1@17.825,5.475 17.905,5.395 18.317,5.395 18.525,5.188 Y2.1@18.525,5.15
FAST_XTAL_B: C4.1 GAP1.F1 Y2.3 | length 3
  Top Sig/Pwr w0.075: v1(17.871,6.397) 17.872,6.397 GAP1.F1@17.875,6.4
  GND1 w0.075: v1(17.871,6.397) v3@18.172,6.097
  GND3 w0.075: v5(19.25,5.913) 19.372,6.001 19.426,6.001 v2(19.45,6.025)
  Sig1 w0.075: v3(18.172,6.097) 18.181,6.088 18.384,6.088 18.422,6.05 18.575,6.05 18.7,5.925 v4(19.025,5.925)
  Pwr w0.075: v4(19.025,5.925) 19.037,5.937 19.107,5.937 v5(19.25,5.913)
  Bot Sig/Pwr w0.075: v2(19.45,6.025) 19.275,6.2 19.275,6.15 19.563,5.863 19.665,5.863 19.9,5.628 C4.1@19.9,5.602
GAP9_pwr_sel: U5.C10 U6.B2 | length 5.8
  Top Sig/Pwr w0.075: U5.C10@8.45,7.075 8.685,6.84 9.923,6.84 10.309,6.453 v1(10.309,6.173)
  GND1 w0.075: v1(10.309,6.173) 10.316,6.166 10.316,6.015 v3(10.323,6.008)
  GND3 w0.075: v2(12.213,6.245) 12.247,6.245 12.336,6.335 12.428,6.335 v5(12.442,6.349)
  Sig1 w0.075: v3(10.323,6.008) 10.957,6.008 11.051,5.915 11.737,5.915 11.754,5.931 12.01,5.931 12.194,6.115 12.252,6.115 12.39,6.254 v4(12.442,6.254)
  Pwr w0.075: v4(12.442,6.254) v5(12.442,6.349)
  Bot Sig/Pwr w0.075: v2(12.213,6.245) 12.237,6.221 12.237,6.088 U6.B2@12.5,5.825 U6.B2@12.5,5.812
GAP_btn: GAP1.K7 | length 7.1
  Top Sig/Pwr w0.075: GAP1.K7@19.275,8.5 19.575,8.5 19.564,8.489 v1(19.564,8.484) ; 23.543,6.242 23.543,7.749 23.636,7.842 v1(23.636,7.876)
  GND1 w0.075: v1(19.564,8.484) 19.564,8.469 19.657,8.376 v3(19.657,8.361) ; v3(23.601,8.374) 23.619,8.356 23.619,8.162 23.657,8.124 23.657,7.897 v1(23.636,7.876)
  Sig1 w0.075: v3(19.657,8.361) 19.691,8.361 19.787,8.265 19.997,8.265 20.406,8.674 22.19,8.674 22.195,8.669 22.802,8.669 22.821,8.688 23.427,8.688 23.577,8.538 23.577,8.398 v3(23.601,8.374)
GAP_CSI2_pwr_sel: GAP1.H4 R32.2 U18.B2 U20.B2 | length 11.9
  Top Sig/Pwr w0.075: v1(15.141,5.676) 15.15,5.685 U20.B2@15.15,5.7 ; v1(15.428,5.039) 15.696,5.039 15.812,5.155 16.08,5.155 R32.2@16.1,5.175 ; R32.2@16.12,5.155 16.283,4.992 16.329,4.992 v1(16.353,4.968)
  GND1 w0.075: v3(14.913,5.52) 14.947,5.52 14.989,5.562 14.999,5.562 15.113,5.676 v1(15.141,5.676) ; v1@15.144,5.673 15.13,5.658 15.13,5.337 v1(15.428,5.039) ; v1@16.344,4.961 16.372,4.961 16.509,4.824 17.509,4.824 v3(17.513,4.828) ; v1(18.569,7.436) 18.59,7.436 18.797,7.23 18.997,7.23 19.011,7.215 19.068,7.215 19.352,6.932 19.352,6.545 19.667,6.23 19.667,5.695 v3(19.451,5.479)
  GND3 w0.075: v5(13.498,7.817) 13.568,7.817 v2(13.599,7.786)
  Sig1 w0.075: v4(13.746,7.671) 13.752,7.666 13.752,6.153 14.147,5.757 14.189,5.757 14.245,5.701 14.434,5.701 14.597,5.538 14.895,5.538 v3(14.913,5.52) ; v3(17.513,4.828) 17.532,4.828 17.588,4.772 17.601,4.772 17.709,4.665 18.894,4.665 19.451,5.221 v3(19.451,5.479)
  Pwr w0.075: v5(13.498,7.817) 13.532,7.817 13.634,7.714 13.703,7.714 v4(13.746,7.671)
  Bot Sig/Pwr w0.075: U18.B2@13.575,7.775 13.586,7.786 v2(13.599,7.786)
GAP_CTRL: GAP1.H3 U5.L3 | length 19.7
  Top Sig/Pwr w0.075: v1(10.5,1.431) 10.5,2.169 11.55,3.219 v1(11.55,3.248) ; v1(11.175,4.2) 11.175,4.234 11.25,4.309 U5.L3@11.25,4.625 ; v1(11.543,0.826) 11.573,0.826 12.011,0.388 18.338,0.388 18.454,0.504 18.454,0.681 18.656,0.882 18.656,2.305 18.949,2.599 19.031,2.599 19.188,2.756 19.188,2.932 19.019,3.101 19.019,3.474 18.954,3.539 18.954,4.451 18.888,4.517 18.834,4.517 18.644,4.706 v1(18.644,5.786)
  GND1 w0.075: v1(10.5,1.431) 10.802,1.129 11.241,1.129 v1(11.543,0.826) ; v1(11.175,4.2) 11.175,4.183 11.033,4.041 11.033,3.805 11.308,3.531 11.308,3.443 11.373,3.378 11.386,3.378 11.516,3.248 v1(11.55,3.248) ; v1(18.582,7.096) 18.606,7.072 18.606,6.968 18.762,6.812 18.762,6.501 18.787,6.475 18.787,5.944 18.644,5.8 v1(18.644,5.786)
GAP_GPIO46: GAP1.H5 J4.29 | length 7
  GND1 w0.075: v1(18.607,7.75) 18.607,7.752 18.687,7.832 v3(18.687,7.834)
  GND3 w0.075: v5(23.241,4.556) 23.248,4.549 23.391,4.549 v2(23.398,4.541)
  Sig1 w0.075: v3(18.687,7.834) 18.696,7.834 18.848,7.682 18.888,7.682 19.323,7.247 19.323,6.879 19.376,6.826 19.376,6.753 20.142,5.987 20.142,5.935 20.263,5.815 21.565,5.815 22.282,5.097 22.282,4.911 22.288,4.905 22.288,4.746 22.42,4.614 22.42,4.586 22.606,4.4 22.802,4.4 v4(22.845,4.357)
  Pwr w0.075: v4(22.845,4.357) 22.888,4.4 23.085,4.4 v5(23.241,4.556)
  Bot Sig/Pwr w0.075: J4.29@23.295,4.553 23.306,4.541 v2(23.398,4.541)
GAP_GPIO47: GAP1.J5 J4.31 | length 7.2
  GND1 w0.075: v1(18.953,7.763) 19.286,7.763 19.417,7.633 19.897,7.633 20.051,7.479 v3(20.085,7.479)
  GND3 w0.075: v5(22.389,6.074) 22.41,6.054 v2(22.41,5.975)
  Sig1 w0.075: v3@20.089,7.474 20.355,7.474 20.374,7.493 20.76,7.493 20.972,7.282 20.972,6.592 21.174,6.39 21.846,6.39 22.04,6.195 v4(22.04,6.135)
  Pwr w0.075: v4(22.04,6.135) 22.077,6.098 22.365,6.098 v5(22.389,6.074)
  Bot Sig/Pwr w0.075: v2(22.41,5.975) 22.41,4.971 22.922,4.459 22.922,4.286 23.049,4.16 23.445,4.16 J4.31@23.455,4.15
GAP_GPIO48: GAP1.G6 J4.37 J5.6 | length 35.9
  Top Sig/Pwr w0.075: J5.6@6.718,12.286 7.012,12.286 7.056,12.329 7.056,12.358 7.155,12.457 7.155,12.514 7.221,12.58 8.614,12.58 8.66,12.534 9.436,12.534 10.863,13.96 10.863,14.127 11.024,14.288 11.19,14.288 11.315,14.413 12.403,14.413 v1(12.922,13.893)
  GND1 w0.075: v1(12.922,13.893) 12.935,13.88 13.119,13.88 v3(13.132,13.867) ; v3(17.898,8.182) 17.911,8.195 18.237,8.195 v1(18.251,8.209)
  Sig2 w0.075: v4(17.745,8.185) 17.788,8.142 17.921,8.142 18.12,7.943 18.12,7.888 18.353,7.655 19.303,7.655 19.398,7.75 19.679,7.75 19.771,7.658 21.549,7.658 21.767,7.441 v4(21.767,7.403)
  GND3 w0.075: v5(21.626,7.349) 21.64,7.363 22.102,7.363 v2(22.115,7.377)
  Sig1 w0.075: v3(13.132,13.867) 13.461,13.867 13.606,14.012 14.093,14.012 14.77,13.335 16.094,13.335 16.118,13.36 16.209,13.36 16.329,13.479 18.329,13.479 20.448,11.36 20.448,10.446 20.463,10.431 20.463,9.937 19.812,9.287 19.812,9.19 20.128,8.875 20.128,8.616 19.993,8.48 19.838,8.48 19.745,8.574 19.569,8.574 19.444,8.449 19.444,8.439 19.404,8.399 19.404,8.254 19.543,8.115 20.018,8.115 20.148,7.985 20.174,7.958 21.321,7.958 21.398,8.035 22.271,8.035 22.336,7.97 22.336,7.908 22.172,7.744 22.172,7.664 22.018,7.51 21.935,7.51 21.828,7.403 v4(21.767,7.403) ; v4(17.745,8.185) 17.895,8.185 v3(17.898,8.182)
  Pwr w0.075: v5(21.626,7.349) 21.68,7.403 v4(21.767,7.403)